# Altium PCB ADS1015_shield.PcbDoc
Units mil, origin at the board's own origin, x right, y up, seen from the top; angles counter-clockwise.
Board outline 688 x 500 mil, 2 copper layers (Top, Bottom), stack 61.811 mil thick; 3 components, 10 nets, 20 pads, 0 vias.
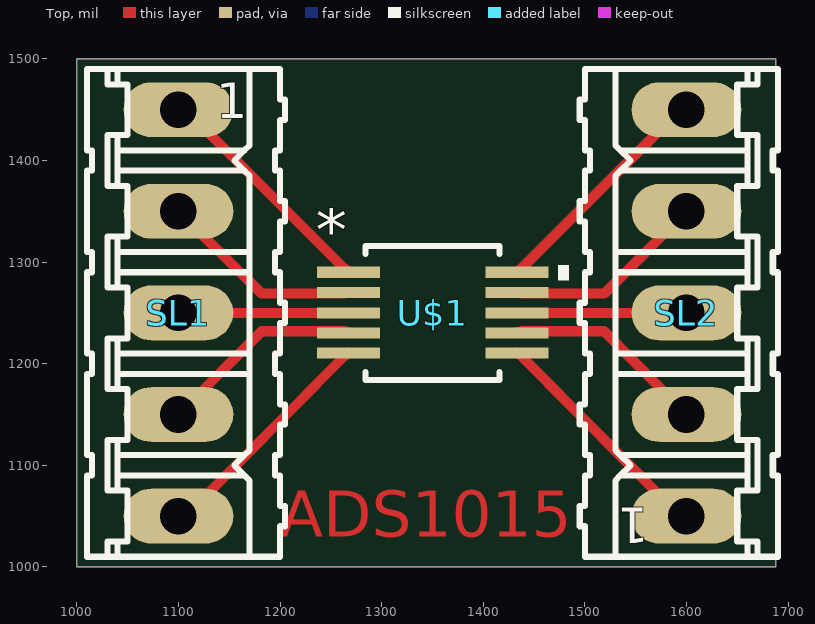
[diagram p0: Top view]
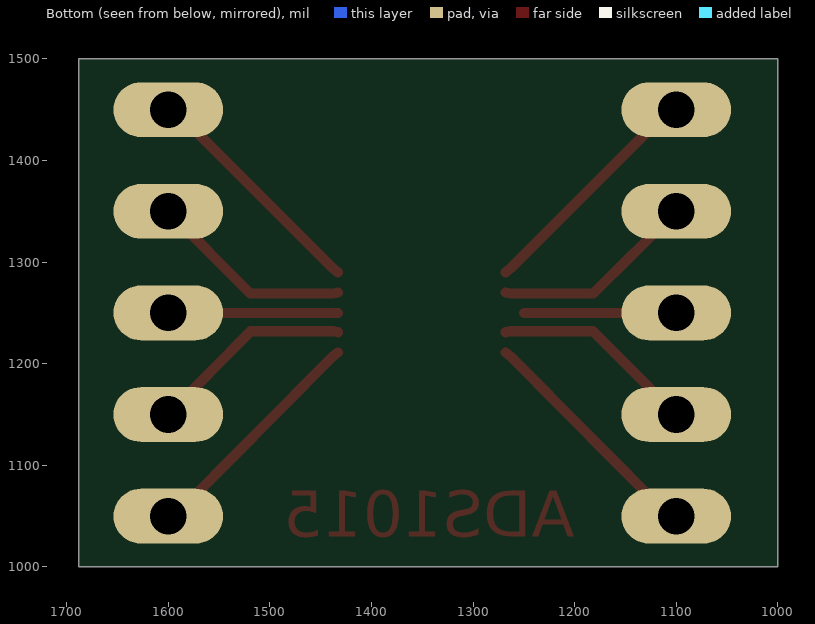
[diagram p1: Bottom view, seen from below]

## Layer stack, top to bottom
Top Solder: solder mask 0.4, Solder Resist, Dk 3.5
Top: signal copper 1.378
Dielectric 1: core 59.0551, FR-4, Dk 4.8
Bottom: signal copper 1.378
Bottom Solder: solder mask 0.4, Solder Resist, Dk 3.5

## Board outline
1000,1000 1688,1000 1688,1500 1000,1500

## Design rules (kind name [scope] priority, off if disabled: settings)
Clearance mdViaVia [IsVia vs IsVia] p1: gap=8
Clearance mdPadVia [IsPad vs IsVia] p2: gap=8
Clearance mdPadPad [IsPad vs IsPad] p3: gap=8
Clearance mdWireVia [(InLayerClass('Signal Layers') AND IsTrack) vs IsVia] p4: gap=8
Clearance mdWirePad [(InLayerClass('Signal Layers') AND IsTrack) vs IsPad] p5: gap=8
Clearance mdWireWire [(InLayerClass('Signal Layers') AND IsTrack) vs (InLayerClass('Signal Layers') AND IsTrack)] p6: gap=8
Clearance [All] p7: gap=8
HoleSize [All] p1: absolutevalues=TRUE maxlimit=100000 minlimit=24 maxpercent=80.000 minpercent=20.000
HoleToHoleClearance [All] p1: gap=8 allowstackedmicrovias=TRUE
PolygonConnect ThermalVias [IsVia] p1: connectstyle=Direct reliefconductorwidth=10 reliefentries=4 polygonreliefangle="90 Angle" airgapwidth=10
PolygonConnect [All] p2: connectstyle=Relief reliefconductorwidth=10 reliefentries=4 polygonreliefangle="90 Angle" airgapwidth=10
RoutingVias [All] p1: holewidth=28 width=50 viastyle="Through Hole" minholewidth=28 minwidth=50 maxholewidth=28 maxwidth=50
SilkToSilkClearance [All] p1 off: silktosilkclearance=10
SilkToSolderMaskClearance [IsPad] p1 off: minsilkscreentomaskgap=10 clearancetoexposedcopper=TRUE
SolderMaskExpansion [All] p1: expansion=4
UnpouredPolygon [All] p1: allowunpoured=FALSE
Width [All] p1: maxlimit=100000 minlimit=10 preferedwidth=10
25 further rules are at their usual default settings.

## Components (designator, comment, footprint, x,y, rotation, side; value= is the part's Value field where it differs from the comment)
SL1 "" 05P 1100,1250 r270 top
SL2 "" 05P 1600,1250 r90 top
U$1 "" DGS10 1350,1250 r0 top

## Footprints (in the part's own frame and the unit in brackets; to place one, negate y for a bottom-side part, rotate by r counter-clockwise, add the part's x,y. Pads: shape width x height; smd on the part's side, far side on the other; paste and mask are expansions set on the pad)
05P [mil] "05P"
  oval 54x108 hole 36: 1(-200,0) 2(-100,0) 3(0,0) 4(100,0) 5(200,0)
  silkscreen extent -240,-90 240,105
DGS10 [mil] "DGS10"
  rect 62x11 smd: 1(-82.5,40) 2(-82.5,20) 3(-82.5,0) 4(-82.5,-19.68) 5(-82.5,-39.37) 6(83,-39.37) 7(83,-19.68) 8(83,0) 9(83,20) 10(83,40)
  silkscreen extent -66,-66 134,66

## Part data
SL1 SL2: library part 05P
U$1: library part DGS10

## Nets (pads, with @x,y where several pads share a name; then routed paths per layer and width w, separated by ;. In a path a pad name is that pad's centre, name@x,y a point inside that pad or via, vN(x,y) a via of type N, cw(c..) or ccw(c..) an arc to the next point about the centre after c; other vN are vias at no path point)
N$1: SL1.1 U$1.1 | length 234
  Top w10: SL1.1 1107,1450 1263,1294 U$1.1@1268,1290
N$2: SL1.2 U$1.2 | length 201.4
  Top w10: SL1.2 1182,1269 1263,1269 U$1.2@1268,1270
N$3: SL1.3 U$1.3 | length 150
  Top w10: SL1.3 U$1.3@1250,1250
N$4: SL1.4 U$1.4 | length 202.1
  Top w10: SL1.4 1182,1232 1263,1232 U$1.4@1268,1231
N$5: SL1.5 U$1.5 | length 234.7
  Top w10: SL1.5 1107,1050 1263,1207 U$1.5@1268,1211
N$6: SL2.1 U$1.6 | length 233.7
  Top w10: U$1.6@1433,1211 1438,1207 1594,1050 SL2.1
N$7: SL2.2 U$1.7 | length 201.4
  Top w10: U$1.7@1433,1231 1438,1232 1519,1232 SL2.2
N$8: SL2.3 U$1.8 | length 167
  Top w10: U$1.8 SL2.3
N$9: SL2.4 U$1.9 | length 200.7
  Top w10: U$1.9 1438,1269 1519,1269 SL2.4
N$10: SL2.5 U$1.10 | length 233
  Top w10: U$1.10 1438,1294 1594,1450 SL2.5

## Keep-outs
Keep-Out Layer:
  the board outline again, w0

## Other copper
Top:
  text "ADS1015" at 1200,1015 h77.5

## Silkscreen, mask and mechanical layers (free items; w line width, h text height)
Dimension:
  the board outline again, w0
Unrouted:
  lines w0: 1250,1250 1268,1250

## Text inside footprints (layer, text, board x,y; h text height)
SL1: Top Overlay "1" at 1137,1430 h60.45
SL2: Top Overlay "1" at 1563,1070 h60.45 r180
U$1: Top Overlay "*" at 1235,1295 h77.5; tDocu "*" at 1281,1258 h77.5